# EAGLE board F4WPDSFIQIA89I7 (EAGLE 7.5.0)
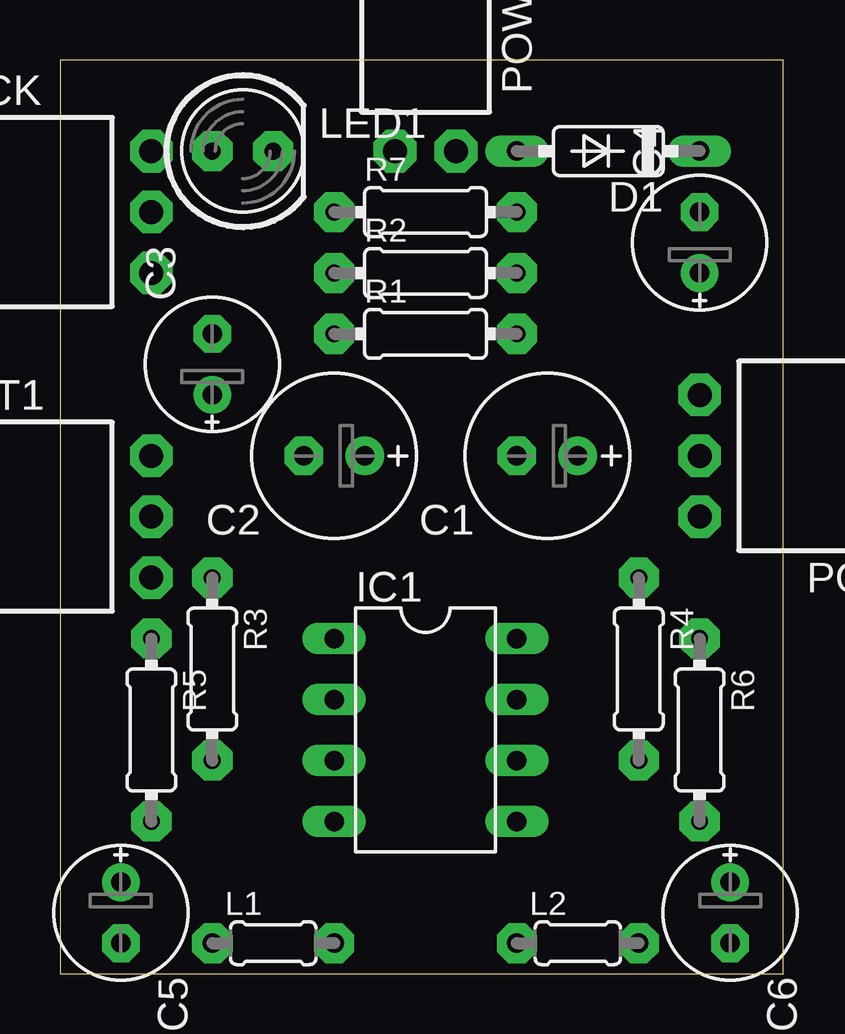
[diagram p0: board, top side]
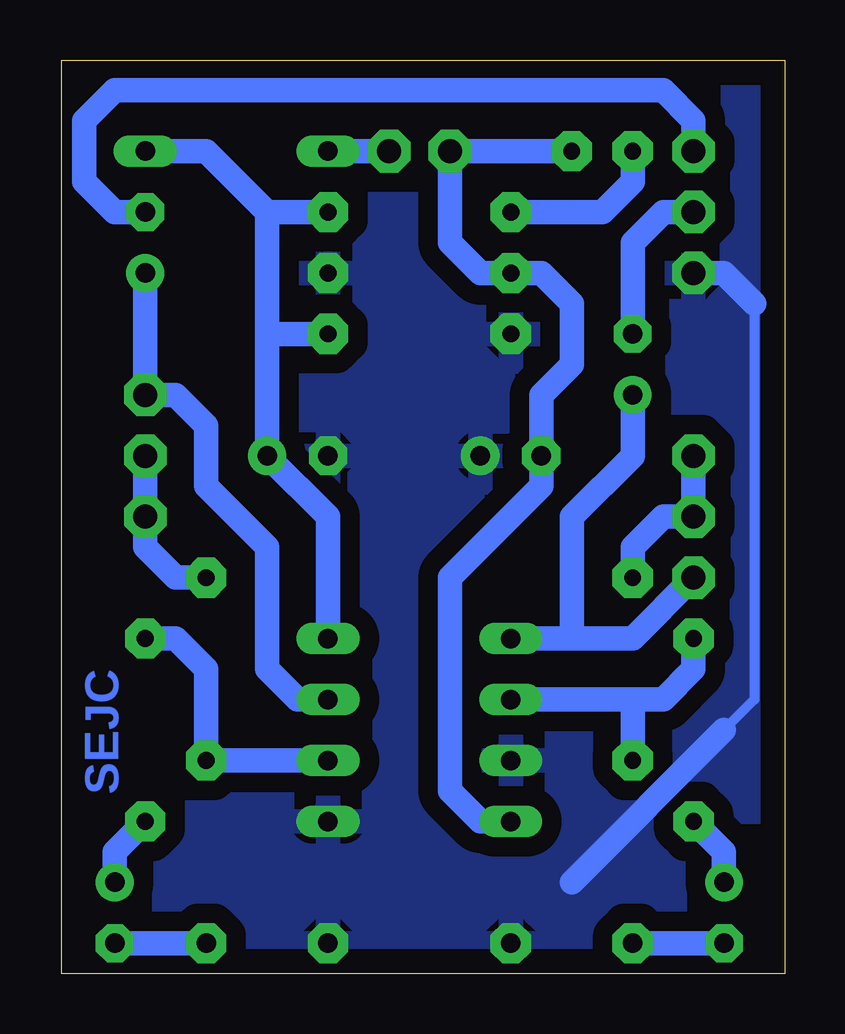
[diagram p1: board, bottom side, seen from below]

Size 30.15 x 38.09 mm. Coordinates in mm from the lower left corner, seen from the top.
Outline: 0,0 30.15,0 30.15,38.09 0,38.09 0,0
Copper layers (1*16): Top 0.035mm / dielectric 1.5mm / Bottom 0.035mm
Design rules "default": minimum track width 10mil, minimum drill 24mil, track to track 8mil, track to pad 8mil, pad to pad 8mil, via to via 8mil, smd to smd 8mil, copper to edge 40mil, drill to drill 8mil, minimum pad ring 10mil, minimum via ring 8mil, stop-mask expansion 4mil, vias tented up to drill 0mil, thermal gap 10mil

## Footprints (pad centres in the part's own frame; a part is rotated, then mirrored left to right if it is on the bottom)
E2,5-7 = drill 0.813 pad 1.6: + -1.27,0 | drill 0.813 pad 1.6 octagon: - 1.27,0
E2,5-6E = drill 0.813 pad 1.575: + -1.27,0 | drill 0.813 pad 1.575 octagon: - 1.27,0
DO35-7 = drill 0.813 long: A 3.81,0; C -3.81,0
DIL08 = drill 0.813 pad 1.27 long: 1 -3.81,-3.81; 2 -1.27,-3.81; 3 1.27,-3.81; 4 3.81,-3.81; 5 3.81,3.81; 6 1.27,3.81; 7 -1.27,3.81; 8 -3.81,3.81
SSW-103-02-S-S-RA = drill 1 pad 1.778 octagon: 1 -2.54,1.524; 2 0,1.524; 3 2.54,1.524
0204/5 = drill 0.813 pad 1.676 octagon: 1 -2.54,0; 2 2.54,0
LED5MM = drill 0.7 pad 1.676 octagon: A -1.27,0; K 1.27,0
SSW-102-02-S-S-RA = drill 1 pad 1.778 octagon: 1 -1.27,1.524; 2 1.27,1.524
0204/7 = drill 0.7 pad 1.676 octagon: 1 -3.81,0; 2 3.81,0

## Placement (x,y rotation side)
C1  100u  [E2,5-7]  20.32,21.59 180 top
C2  100u  [E2,5-7]  11.43,21.59 180 top
C3  2.2u  [E2,5-6E]  6.35,25.4 90 top
C4  2.2u  [E2,5-6E]  26.67,30.48 90 top
C5  2.2u  [E2,5-6E]  2.54,2.54 270 top
C6  2.2u  [E2,5-6E]  27.94,2.54 270 top
D1  [DO35-7]  22.86,34.29 180 top
IC1  LM358N  [DIL08]  15.24,10.16 270 top
JACK  [SSW-103-02-S-S-RA]  2.29,31.75 270 top
L1  100mH  [0204/5]  8.89,1.27 0 top
L2  100mH  [0204/5]  21.59,1.27 0 top
LED1  [LED5MM]  7.62,34.29 0 top
POT1  [SSW-103-02-S-S-RA]  2.29,19.05 270 top
POT2  [SSW-103-02-S-S-RA]  28.19,21.59 90 top
POWER  [SSW-102-02-S-S-RA]  15.24,35.81 180 top
R1  100k  [0204/7]  15.24,26.67 0 top
R2  100k  [0204/7]  15.24,29.21 0 top
R3  10k  [0204/7]  6.35,12.7 270 top
R4  10k  [0204/7]  24.13,12.7 270 top
R5  1k  [0204/7]  3.81,10.16 270 top
R6  1k  [0204/7]  26.67,10.16 270 top
R7  1k  [0204/7]  15.24,31.75 0 top

## Library data of the parts
C1-C6 L1 L2 R1-R7 = rcl
D1 = diode
IC1 = linear
JACK POT1 POT2 = con-samtec; MPN: SSW-103-02-S-S-RA; OC_FARNELL: unknown; OC_NEWARK: 11P9368
LED1 = led
POWER = con-samtec; MPN: SSW-102-02-S-S-RA; OC_FARNELL: unknown; OC_NEWARK: 11P9352

## Nets
+5V: C1.+ D1.C IC1.8 R1.2 R7.2
-5V: C2.- IC1.4 LED1.K POWER.2 R2.1
GND: C1.- C2.+ IC1.3 IC1.5 JACK.3 L1.2 L2.1 R1.1 R2.2
N$1: IC1.2 R3.2 R5.1
N$2: C3.+ IC1.1 POT1.3
N$3: C4.+ IC1.7 POT2.3
N$4: POT1.1 POT1.2 R3.1
N$5: IC1.6 R4.2 R6.1
N$6: POT2.1 POT2.2 R4.1
N$7: C5.+ R5.2
N$8: C6.+ R6.2
N$9: D1.A POWER.1
N$10: C3.- JACK.2
N$11: C4.- JACK.1
N$12: C5.- L1.1
N$13: C6.- L2.2
N$14: LED1.A R7.1

## Tracks (layer width: path | path; a pad name or v marks a point on that pad's centre or on a via)
+5V
  Bottom 1.016: D1.C 24.13,34.29 21.59,31.75 | IC1.8 19.05,19.05 C1.+ 21.59,26.67 | R7.2 21.59,31.75 | 21.59,31.75 21.59,26.67 | R1.2 21.59,26.67
-5V
  Bottom 1.016: IC1.4 12.7,6.35 13.97,7.62 13.97,16.51 10.16,20.32 C2.- 10.16,24.13 8.89,25.4 8.89,27.94 10.16,29.21 R2.1 12.7,29.21 13.97,30.48 POWER.2 LED1.K
GND
  Bottom 0.406: 1.27,27.94 1.27,11.43 2.54,10.16
  Bottom 1.016: JACK.3 2.54,29.21 1.27,27.94 | 2.54,10.16 8.89,3.81
  pour Bottom (isolate 0.813): 30.48,38.1 30.48,0 0,0 0,38.1
N$1
  Bottom 1.016: R5.1 3.81,12.7 5.08,11.43 6.35,11.43 | IC1.2 6.35,11.43 | R3.2 6.35,11.43
N$2
  Bottom 1.016: POT1.3 6.35,13.97 8.89,13.97 | 8.89,13.97 8.89,19.05 6.35,21.59 C3.+ | 8.89,13.97 IC1.1
N$3
  Bottom 1.016: IC1.7 20.32,11.43 21.59,12.7 21.59,17.78 24.13,20.32 24.13,22.86 25.4,24.13 POT2.3 C4.+
N$4
  Bottom 1.016: POT1.1 POT1.2 5.08,19.05 6.35,17.78 R3.1
N$5
  Bottom 1.016: IC1.6 R4.2 24.13,12.7 25.4,13.97 R6.1
N$6
  Bottom 1.016: POT2.2 POT2.1 26.67,17.78 25.4,16.51 R4.1
N$7
  Bottom 1.016: R5.2 2.54,5.08 C5.+
N$8
  Bottom 1.016: R6.2 27.94,5.08 C6.+
N$9
  Bottom 1.016: POWER.1 D1.A
N$10
  Bottom 1.016: JACK.2 5.08,31.75 6.35,30.48 C3.-
N$11
  Bottom 1.016: JACK.1 3.81,35.56 5.08,36.83 27.94,36.83 29.21,35.56 29.21,33.02 27.94,31.75 C4.-
N$12
  Bottom 1.016: L1.1 C5.-
N$13
  Bottom 1.016: C6.- L2.2
N$14
  Bottom 1.016: R7.1 7.62,31.75 6.35,33.02 LED1.A

## Text on the board
Bottom: SEJC